# Altium PCB Hardware.PcbDoc
Units mm, origin at the board's own origin, x right, y up, seen from the top; angles counter-clockwise.
Board outline 69.8 x 101.5 mm, 2 copper layers (Top Layer, Bottom Layer); 28 components, 39 nets, 206 pads, 0 vias.
Unrouted connection lines stored in the file: 52.
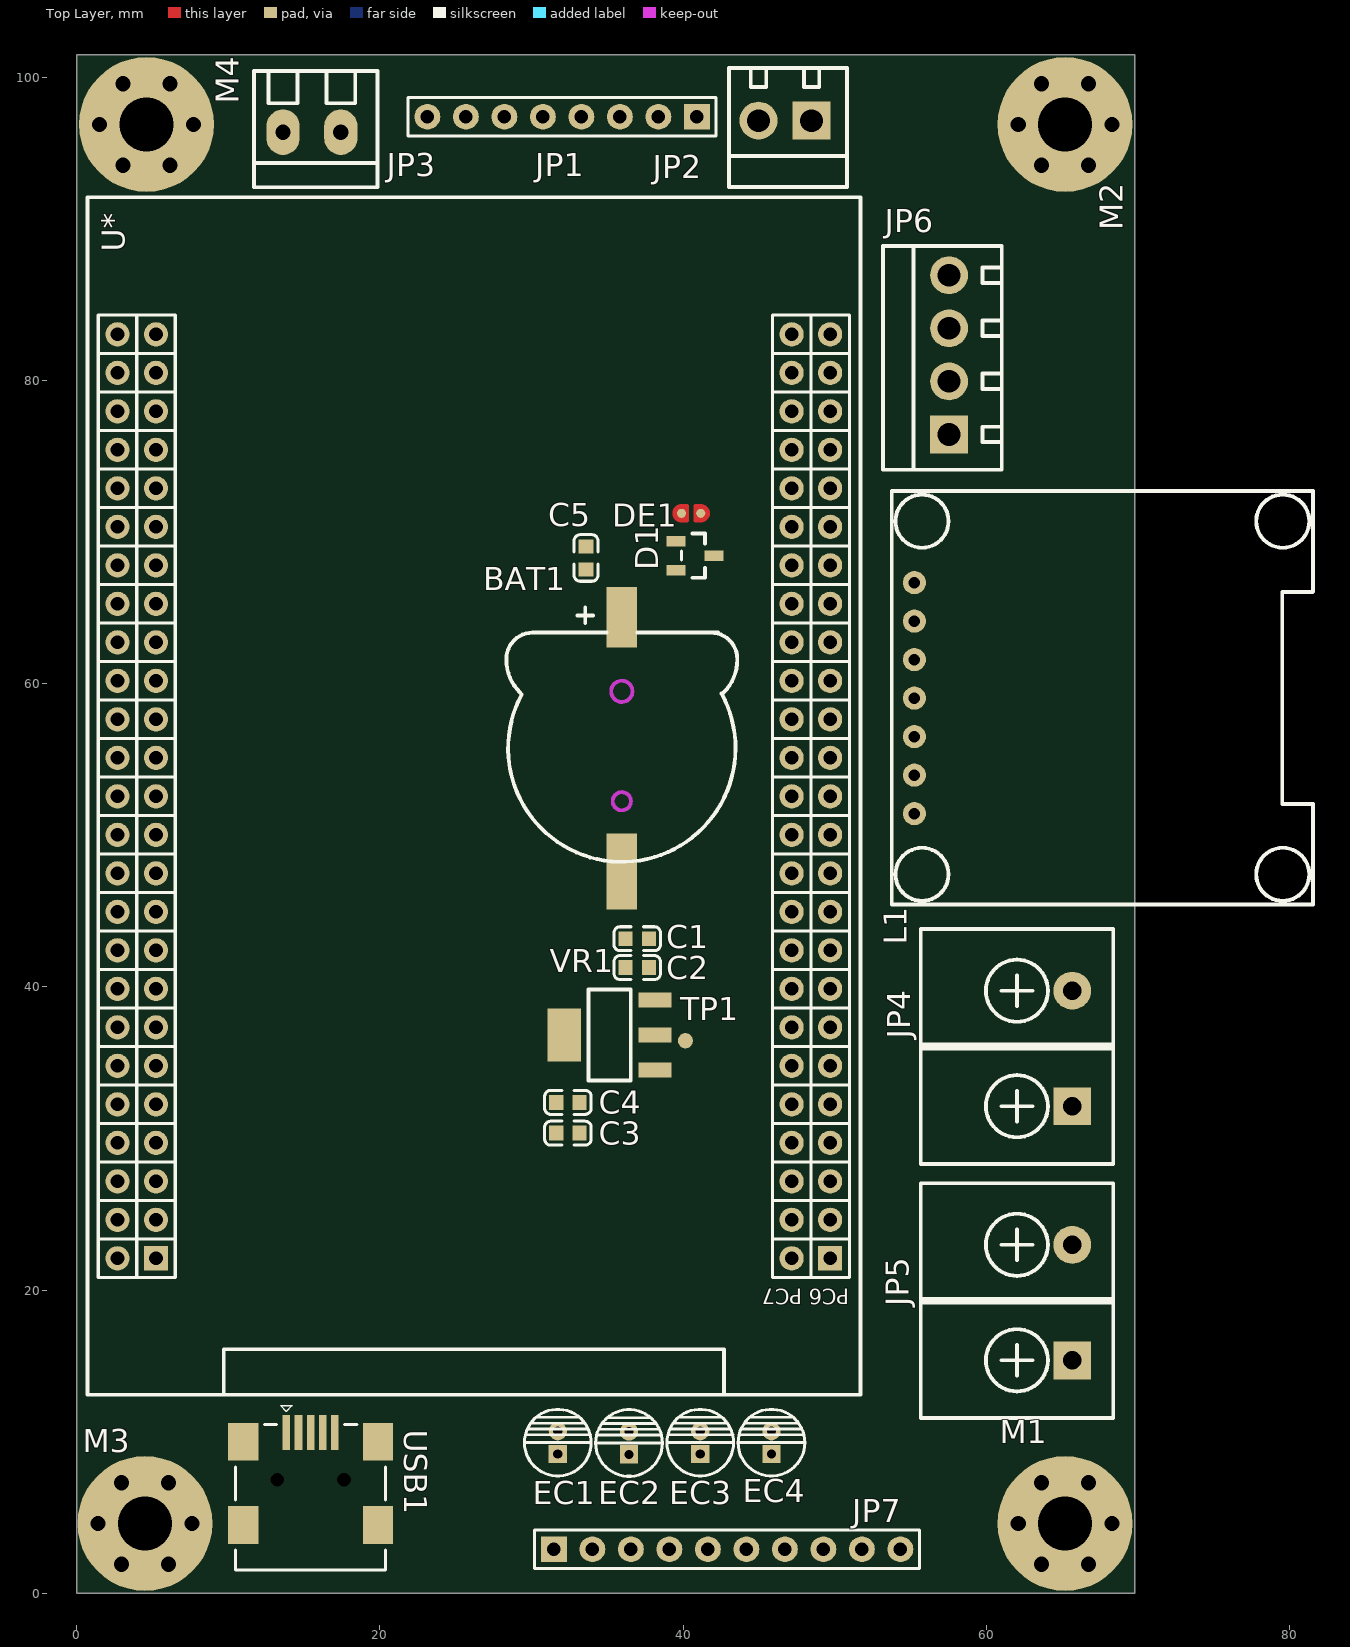
[diagram p0: Top Layer view]
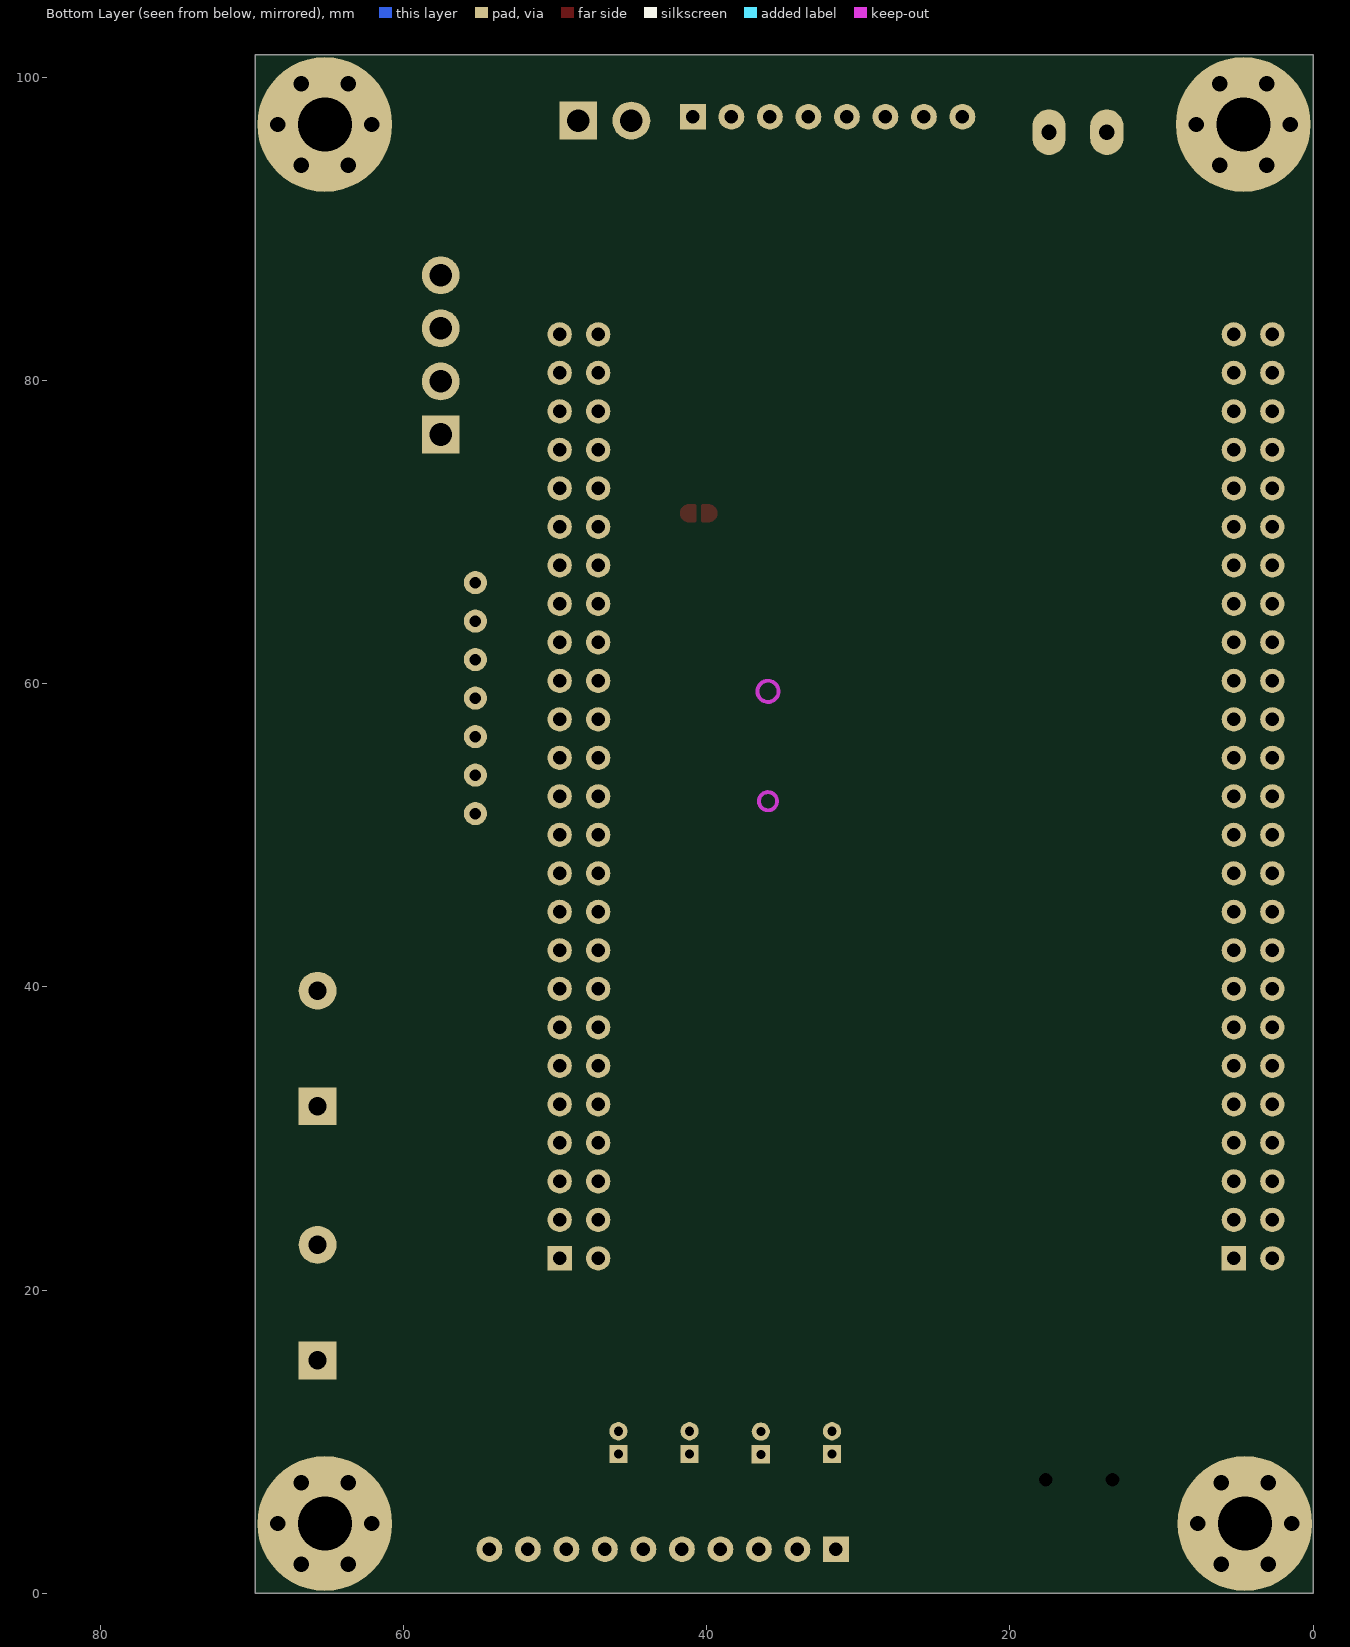
[diagram p1: Bottom Layer view, seen from below]

## Layer stack, top to bottom
Top Solder: solder mask 0.0102, Solder Resist, Dk 3.5
Top Layer: signal copper 0.0356
Dielectric 1: dielectric 0.32, FR-4, Dk 4.8
Bottom Layer: signal copper 0.0356
Bottom Solder: solder mask 0.0102, Solder Resist, Dk 3.5

## Board outline
0,0 0,101.5 69.8,101.5 69.8,0

## Design rules (kind name [scope] priority, off if disabled: settings)
Clearance [All] p1: gap=0.254 ignorepadtopadclearanceinfootprint=FALSE except(0: Arc-Hole Track-Hole SMDPad-Hole THPad-Hole Via-Hole Fill-Hole Poly-Hole Region-Hole Text-Hole)
PolygonConnect [All] p1: connectstyle=Relief reliefconductorwidth=0.254 reliefentries=4 polygonreliefangle="90 Angle" airgapwidth=0.254
RoutingVias [All] p1: holewidth=0.711 width=1.27 viastyle="Through Hole" minholewidth=0.711 minwidth=1.27 maxholewidth=0.711 maxwidth=1.27
SolderMaskExpansion [All] p1: expansion=0.102
Width [All] p1: maxlimit=0.254 minlimit=0.254 preferedwidth=0.254
30 further rules are at their usual default settings.

## Classes and differential pairs
component class General: M1 M2 M3 M4
component class Designator: BAT1 C5 D1 DE1 U*

## Components (designator, comment, footprint, x,y, rotation, side; value= is the part's Value field where it differs from the comment)
BAT1 "CR1220" CR1220-A 35.96,64.389 r90 top
C1 "100nF (104) 10% 50V" 0603_C 36.976,43.18 r0 top
C2 "10uF (106) 10% 10V" 0603_C 36.976,41.275 r0 top
C3 "22uF (226) 20% 6.3V" 0603_C 32.404,30.353 r180 top
C4 "100nF (104) 10% 50V" 0603_C 32.404,32.385 r180 top
C5 "1uF (105) 10% 50V" 0603_C 33.6,68.3 r270 top
D1 "BAV70 A4" SOT-23(SOT-23-3) 40.786,68.453 r180 top
DE1 "DEBUG PAD" DEBUG_B 40.532,71.247 r0 top
EC1 "10uF" DIP-EC1.5X4X8 31.735,9.187 r90 top
EC2 "10uF" DIP-EC1.5X4X8 36.434,9.163 r90 top
EC3 "10uF" DIP-EC1.5X4X8 41.133,9.187 r90 top
EC4 "10uF" DIP-EC1.5X4X8 45.832,9.187 r90 top
JP1 "HDR-1X8" HDR2.54-M-LI-8P 32.023,97.409 r180 top
JP2 "HDR-1X2" KF350-2P 48.477,97.155 r180 top
JP3 "HDR-1X2" KF128-3.81-2P 17.418,96.393 r180 top
JP4 "HDR-1X2" KF7620-2P 65.678,32.131 r90 top
JP5 "HDR-1X2" KF7620-2P 65.678,15.367 r90 top
JP6 "HDR-1X4" KF350-4P 57.55,76.454 r90 top
JP7 "HDR-1X10" HDR2.54-LI-10P 42.91,2.9 r0 top
L1 "OLED-12864" OLED-12864 87.268,55.245 r90 top
M1 "M3" "M3 140X350" 65.2,4.6 r0 top
M2 "M3" "M3 140X350" 65.2,96.901 r0 top
M3 "M3" "M3 140X350" 4.5,4.6 r0 top
M4 "M3" "M3 140X350" 4.6,96.901 r0 top
TP1 "TEST" "TEST 1" 40.151,36.449 r90 top
U* "U*" STM32F407MiniBoard 49.701,22.098 r90 top
USB1 "MINI-USB" USB-MINI-A 13.827,10.601 r0 top
VR1 "AMS1117-3.3" SOT-223 35.15,36.83 r0 top

## Footprints (in the part's own frame and the unit in brackets; to place one, negate y for a bottom-side part, rotate by r counter-clockwise, add the part's x,y. Pads: shape width x height; smd on the part's side, far side on the other; paste and mask are expansions set on the pad)
0603_C [mm]
  rect 0.93x0.98 smd: 1(-0.77,0) 2(0.77,0)
  silkscreen extent -1.53,-0.79 1.54,0.79, body extent -0.8,-0.4 0.8,0.4, height 0.3
CR1220-A [mm]
  rect 4x2 smd: 1(0,0)
  rect 5x2 smd: 2(-16.764,0)
  Keep-Out Layer circle w0.254: c-12.136,0 r0.6
  Keep-Out Layer circle w0.254: c-4.886,0 r0.7
  silkscreen extent -16.13,-7.62 0.63,7.62, body extent -18.77,-7.37 0.99,7.53, height 4.05
DEBUG_B [mm] "调试断点焊盘"
  round 0.6 smd paste-0.6: 1(-0.635,0) 2(0.635,0)
  Top Layer region: 0.254,-0.508 0.762,-0.508 0.908,-0.479 1.031,-0.396 1.114,-0.273 1.143,-0.127 1.143,-0.127 1.143,0 1.104,0.194 0.994,0.359 0.829,0.469 0.635,0.508 0.635,0.508 0.254,0.508
  Top Layer region: -0.254,0.508 -0.762,0.508 -0.908,0.479 -1.031,0.396 -1.114,0.273 -1.143,0.127 -1.143,0.127 -1.143,0 -1.104,-0.194 -0.994,-0.359 -0.829,-0.469 -0.635,-0.508 -0.635,-0.508 -0.254,-0.508
  Top Layer lines w0.203: -0.635,-0.508 cw(c-0.635,0) -0.635,0.508 -0.254,0.508 -0.254,-0.508 -0.635,-0.508 ; 0.254,-0.508 0.254,0.508 0.635,0.508 cw(c0.635,0) 0.635,-0.508 0.254,-0.508
DIP-EC1.5X4X8 [mm]
  rect 1.2x1.2 hole 0.6: 1(0,0)
  round 1.2 hole 0.6: 2(1.5,0)
  silkscreen extent -1.45,-2.2 2.95,2.2, body extent -1.26,-1.97 2.76,2.03, height 8.04
HDR2.54-LI-10P [mm] "排针，10脚"
  rect 1.7x1.7 hole 0.9: 1(-11.43,0)
  round 1.7 hole 0.9: 2(-8.89,0) 3(-6.35,0) 4(-3.81,0) 5(-1.27,0) 6(1.27,0) 7(3.81,0) 8(6.35,0) 9(8.89,0) 10(11.43,0)
  silkscreen extent -12.7,-1.27 12.7,1.27, body extent -12.7,-1.27 12.7,1.27, height 8.5
HDR2.54-M-LI-8P [mm] "排母，8脚"
  rect 1.7x1.7 hole 0.9: 1(-8.89,0)
  round 1.7 hole 0.9: 2(-6.35,0) 3(-3.81,0) 4(-1.27,0) 5(1.27,0) 6(3.81,0) 7(6.35,0) 8(8.89,0)
  silkscreen extent -10.16,-1.27 10.16,1.27, body extent -10.16,-1.27 10.16,1.27, height 8.5
KF128-3.81-2P [mm] "螺钉式接线端子，脚距3.81mm"
  oval 2.2x3 hole 1: 1(0,0) 2(3.81,0)
  silkscreen extent -2.41,-4.04 5.72,3.63, body extent -2.41,-3.83 5.71,3.57, height 8.55
KF350-2P [mm] "可拼接端子/10A"
  rect 2.5x2.5 hole 1.5: 1(0,0)
  round 2.5 hole 1.5: 2(3.5,0)
  silkscreen extent -2.34,-3.48 5.44,4.37, body extent -2.15,-3.34 5.25,4.16, height 10
KF350-4P [mm] "可拼接端子/10A"
  rect 2.5x2.5 hole 1.5: 1(0,0)
  round 2.5 hole 1.5: 2(3.5,0) 3(7,0) 4(10.5,0)
  silkscreen extent -2.34,-3.48 12.44,4.37, body extent -2.15,-3.34 12.25,4.16, height 10
KF7620-2P [mm] "15.2*12*12mm(长宽高)"
  rect 2.5x2.5 hole 1.2: 1(0,0)
  round 2.5 hole 1.2: 2(7.62,0)
  silkscreen extent -3.81,-2.7 11.68,10, body extent -3.81,-2.52 12.13,9.88, height 12.45
"M3 140X350" [mil] "M3螺丝孔，孔140Mil，焊盘350Mil"
  round 35 hole 40: 1(-122,0) 1(-61,-105.66) 1(-61,105.66) 1(61,-105.66) 1(61,105.66) 1(122,0)
  round 350 hole 140: 1(0,0)
OLED-12864 [mil]
  round 60 hole 30: 1(-150,1260) 2(-50,1260) 3(50,1260) 4(150,1260) 5(250,1260) 6(350,1260) 7(450,1260)
  silkscreen extent -386,225 688,1319, body extent -376,313 676,1188, height 24
SOT-23(SOT-23-3) [mm]
  rect 1.25x0.7 smd: 1(1.25,-0.95) 2(1.25,0.95) 3(-1.25,0)
  silkscreen extent -0.65,-1.46 0.9,1.46, body extent -1.5,-1.5 1.5,1.5, height 1.3
SOT-223 [mm]
  rect 2.2x1 smd: 1(3,-2.3) 2(3,0) 3(3,2.3)
  rect 2.2x3.5 smd: 2(-3,0)
  silkscreen extent -1.4,-3 1.4,3, body extent -3.49,-3.24 3.49,3.24, height 1.64
STM32F407MiniBoard [mm]
  rect 1.6x1.6 hole 0.9: 1(0,0) 51(0,44.475)
  round 1.6 hole 0.9: 2(0,2.54) 3(2.54,0) 4(2.54,2.54) 5(5.08,0) 6(5.08,2.54) 7(7.62,0) 8(7.62,2.54) 9(10.16,0) 10(10.16,2.54) 11(12.7,0) 12(12.7,2.54) 13(15.24,0) 14(15.24,2.54) 15(17.78,0) 16(17.78,2.54) 17(20.32,0) 18(20.32,2.54) 19(22.86,0) 20(22.86,2.54) 21(25.4,0) 22(25.4,2.54) 23(27.94,0) 24(27.94,2.54) 25(30.48,0) 26(30.48,2.54) 27(33.02,0) 28(33.02,2.54) 29(35.56,0) 30(35.56,2.54) 31(38.1,0) 32(38.1,2.54) 33(40.64,0) 34(40.64,2.54) 35(43.18,0) 36(43.18,2.54) 37(45.72,0) 38(45.72,2.54) 39(48.26,0) 40(48.26,2.54) 41(50.8,0) 42(50.8,2.54) 43(53.34,0) 44(53.34,2.54) 45(55.88,0) 46(55.88,2.54) 47(58.42,0) 48(58.42,2.54) 49(60.96,0) 50(60.96,2.54) 52(2.54,44.475) 53(5.08,44.475) 54(7.62,44.475) 55(10.16,44.475) 56(12.7,44.475) 57(15.24,44.475) 58(17.78,44.475) 59(20.32,44.475) 60(22.86,44.475) 61(25.4,44.475) 62(27.94,44.475) 63(30.48,44.475) 64(33.02,44.475) 65(35.56,44.475) 66(38.1,44.475) 67(40.64,44.475) 68(43.18,44.475) 69(45.72,44.475) 70(48.26,44.475) 71(50.8,44.475) 72(53.34,44.475) 73(55.88,44.475) 74(58.42,44.475) 75(60.96,44.475) 76(60.96,47.015) 77(58.42,47.015) 78(55.88,47.015) 79(53.34,47.015) 80(50.8,47.015) 81(48.26,47.015) 82(45.72,47.015) 83(43.18,47.015) 84(40.64,47.015) 85(38.1,47.015) 86(35.56,47.015) 87(33.02,47.015) 88(30.48,47.015) 89(27.94,47.015) 90(25.4,47.015) 91(22.86,47.015) 92(20.32,47.015) 93(17.78,47.015) 94(15.24,47.015) 95(12.7,47.015) 96(10.16,47.015) 97(7.62,47.015) 98(5.08,47.015) 99(2.54,47.015) 100(0,47.015)
  silkscreen extent -9,-2 70,49, body extent -1.27,-1.27 62.23,48.29, height 8.5
"TEST 1" [mm] "测试点1mm"
  round 1 smd paste-1: 1(0,0)
USB-MINI-A [mm]
  rect 2x2.5 smd: 0(-2.85,-6.108) 0(-2.85,-0.608) 0(6.05,-6.108) 0(6.05,-0.608)
  rect 0.5x2.3 smd: 1(0,0) 2(0.8,0) 3(1.6,0) 4(2.4,0) 5(3.2,0)
  round 0.6 hole 0.9 unplated: MH1(3.8,-3.108) MH2(-0.6,-3.108)
  silkscreen extent -3.35,-9.06 6.55,1.78, body extent -3.17,-9.04 6.33,0.66, height 3.95

## Part data
C1 C4: library part "0603 100nF (104) 10% 50V", "贴片电容", Package=0603, SuppliersPartNumber=C14663, ComponentLink1Description=供应商链接, ComponentLink1URL=http://www.szlcsc.com/product/details_15331.html, Supplier=LC
C2: library part "0603 10uF (106) 10% 10V", "贴片电容", Package=0603, SuppliersPartNumber=C19702, ComponentLink1Description=供应商链接, ComponentLink1URL=http://www.szlcsc.com/product/details_20411.html, Supplier=LC
C3: library part "0603 22uF (226) 20% 6.3V", "贴片电容", Package=0603, SuppliersPartNumber=C59461, ComponentLink1Description=供应商链接, ComponentLink1URL=http://www.szlcsc.com/product/details_60514.html, Supplier=LC
C5: library part "0603 1uF (105) 10% 50V", "贴片电容", Package=0603, SuppliersPartNumber=C15849, ComponentLink1Description=供应商链接, ComponentLink1URL=http://www.szlcsc.com/product/details_16531.html, Supplier=LC
D1: library part "SOT-23 BAV70 A4", "开关二极管", Package=SOT-23, SuppliersPartNumber=C68978, ComponentLink1Description=供应商链接, ComponentLink1URL=http://www.szlcsc.com/product/details_70091.html, Supplier=LC
DE1: library part DEBUG, "调试断点焊盘"
EC1 EC2 EC3 EC4: library part DIP_ECAP, "直插电解电容"
JP1: library part "Header 8", "8P接插件", BOM名称=8P接插件, 学习资源=www.ooocke.com, 版权归属=源创客
JP2 JP3 JP4 JP5: library part "Header 2", "2P接插件"
  JP2 JP4 JP5: BOM名称=2P接插件, 学习资源=www.ooocke.com, 版权归属=源创客
JP6: library part "Header 4", "4P接插件", BOM名称=4P接插件, 学习资源=www.ooocke.com, 版权归属=源创客
JP7: library part "Header 10", "10P接插件", BOM名称=10P接插件, 学习资源=www.ooocke.com, 版权归属=源创客
M1 M2 M3 M4: "铜柱孔"
TP1: "测试点", BOM名称=测试点, 学习资源=www.ooocke.com, 版权归属=源创客
U*: library part STM32F407MiniBoard
VR1: library part "SOT-223 AMS1117-3.3", "低压差线性稳压(LDO)", Package=SOT-223, SuppliersPartNumber=C6186, ComponentLink1Description=供应商链接, ComponentLink1URL=http://www.szlcsc.com/product/details_6652.html, Supplier=LC

## Nets (pads, with @x,y where several pads share a name; then routed paths per layer and width w, separated by ;. In a path a pad name is that pad's centre, name@x,y a point inside that pad or via, vN(x,y) a via of type N, cw(c..) or ccw(c..) an arc to the next point about the centre after c; other vN are vias at no path point)
3V3: C3.2 C4.2 JP7.1 L1.2 TP1.1 VR1.2
3V3STM32: C5.2 D1.1 DE1.1 U*.73 U*.74 U*.75
+5: C1.2 C2.2 JP5.2 JP6.1 U*.48 U*.50 USB1.1 VR1.3
+12V: EC1.1 EC2.1 EC3.1 EC4.1 JP3.1 JP4.2
GND: BAT1.2 C1.1 C2.1 C3.1 C4.1 C5.1 EC1.2 EC2.2 EC3.2 EC4.2 JP3.2 JP4.1 JP5.1 JP6.4 JP7.2 L1.1 U*.47 U*.49 U*.76 USB1.5 VR1.1
KEY_C1: JP1.5
KEY_C2: JP1.6
KEY_C3: JP1.7
KEY_C4: JP1.8
KEY_R1: JP1.1
KEY_R2: JP1.2
KEY_R3: JP1.3
KEY_R4: JP1.4
NetBAT1_1: BAT1.1 D1.2
NetJP2_1: JP2.1 U*.58
NetJP2_2: JP2.2 U*.1
NetJP6_2: JP6.2 U*.18
NetJP6_3: JP6.3 U*.69
NetJP7_3: JP7.3 U*.99
NetJP7_4: JP7.4 U*.52
NetJP7_5: JP7.5
NetJP7_6: JP7.6
NetJP7_7: JP7.7
NetJP7_8: JP7.8
NetJP7_9: JP7.9
NetJP7_10: JP7.10
NetU*_2: U*.2
NetU*_19: U*.19
NetU*_23: U*.23
NetU*_32: U*.32
NetU*_62: U*.62
NetU*_71: U*.71
NetU*_89: U*.89
OLED_CS: L1.7
OLED_D0: L1.3
OLED_D1: L1.4
OLED_DC: L1.6
OLED_RES: L1.5
VBAT: D1.3 DE1.2 U*.46
pads on no net: M1.1 M2.1 M3.1 M4.1 U*.3 U*.4 U*.5 U*.6 U*.7 U*.8 U*.9 U*.10 U*.11 U*.12 U*.13 U*.14 U*.15 U*.16 U*.17 U*.20 U*.21 U*.22 U*.24 U*.25 U*.26 U*.27 U*.28 U*.29 U*.30 U*.31 U*.33 U*.34 U*.35 U*.36 U*.37 U*.38 U*.39 U*.40 U*.41 U*.42 U*.43 U*.44 U*.45 U*.51 U*.53 U*.54 U*.55 U*.56 U*.57 U*.59 U*.60 U*.61 U*.63 U*.64 U*.65 U*.66 U*.67 U*.68 U*.70 U*.72 U*.77 U*.78 U*.79 U*.80 U*.81 U*.82 U*.83 U*.84 U*.85 U*.86 U*.87 U*.88 U*.90 U*.91 U*.92 U*.93 U*.94 U*.95 U*.96 U*.97 U*.98 U*.100 USB1.0 USB1.2 USB1.3 USB1.4 USB1.MH1 USB1.MH2

## Silkscreen, mask and mechanical layers (free items; w line width, h text height)
Mechanical 1:
  the board outline again, w0.254

## Text inside footprints (layer, text, board x,y; h text height)
U*: Top Overlay "PC6 PC7" at 50.971,20.098 h1 r180